# Altium PCB opto.PcbDoc (part 2 of 2)
Units mm, origin at the board's own origin, x right, y up, seen from the top; angles counter-clockwise.
Board outline 200 x 100 mm, 4 copper layers (Top Layer, Internal Plane 1, Internal Plane 2, Bottom Layer); 191 components, 0 nets, 885 pads, 39 vias.
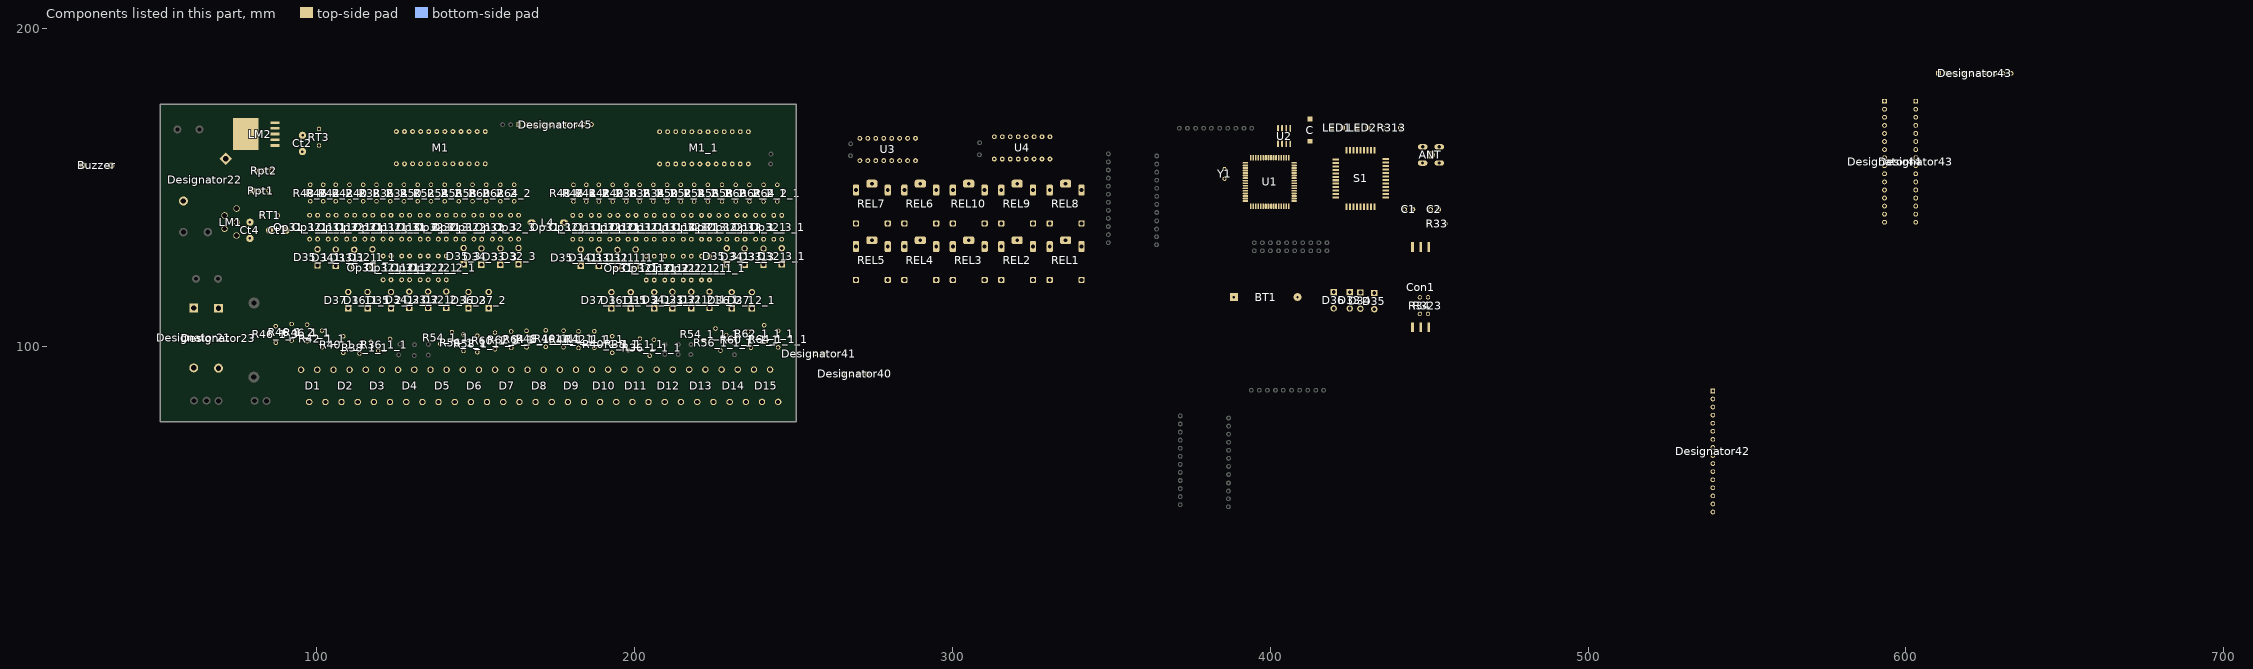
[diagram p4: the components of this part, seen from the top]

## Via types
v1: diameter 0.6, hole 0.4, Top Layer to Bottom Layer, 10 vias
v2: diameter 1.27, hole 0.711, Top Layer to Bottom Layer, 8 vias
v3: diameter 0.8, hole 0.5, Top Layer to Bottom Layer, 6 vias
v4: diameter 1, hole 0.7, Top Layer to Bottom Layer, 5 vias
v5: diameter 0.7, hole 0.4, Top Layer to Bottom Layer, 4 vias
v6: diameter 0.9, hole 0.6, Top Layer to Bottom Layer, 3 vias
v7: diameter 0.5, hole 0.4, Top Layer to Bottom Layer, 1 vias
v8: diameter 1, hole 0.6, Top Layer to Bottom Layer, 1 vias
v9: diameter 1, hole 0.65, Top Layer to Bottom Layer, 1 vias

## Nets (pads, with @x,y where several pads share a name; then routed paths per layer and width w, separated by ;. In a path a pad name is that pad's centre, name@x,y a point inside that pad or via, vN(x,y) a via of type N, cw(c..) or ccw(c..) an arc to the next point about the centre after c; other vN are vias at no path point) (continued)
copper on no net: | length 10328.6
  Top Layer w0.2: 269.635,131.367 269.635,131.477 ; 275.87,158.152 275.87,158.417 ; v2@281.82,154.967 v2(282.245,154.892) ; 329.595,131.367 330.595,131.367 ; 346.145,146.442 346.145,146.492 ; 348.365,157.997 349.05,157.997 ; 348.78,155.457 349.05,155.457 ; 370.971,75.549 371.656,75.549 ; 371.386,73.009 371.656,73.009 ; 392.109,151.24 392.177,151.308
  Top Layer w0.254: 64.742,135.916 65.707,135.916 ; 91.793,163.805 91.92,163.678 ; 103.527,139.269 103.567,139.309 ; 120.625,133.728 120.839,133.728 ; 120.799,139.269 120.839,139.309 ; 122.958,150.826 123.085,150.826 ; 123.085,133.427 123.085,133.728 ; 132.483,139.269 132.523,139.309 ; v3@136.674,132.338 v3(136.801,132.338) ; 138.198,139.269 138.238,139.309 ; 140.738,133.554 140.738,133.728 ; 143.659,139.269 143.699,139.309 ; 149.374,139.396 149.414,139.436 ; 155.216,139.269 155.256,139.309 ; 186.331,139.218 186.371,139.258 ; v6@189.913,169.012 v6(189.913,169.139) ; 203.429,133.677 203.643,133.677 ; 203.603,139.218 203.643,139.258 ; 205.762,150.775 205.889,150.775 ; 205.889,133.376 205.889,133.677 ; 215.287,139.218 215.327,139.258 ; v3@219.478,132.287 v3(219.605,132.287) ; 221.002,139.218 221.042,139.258 ; 223.542,133.503 223.542,133.677 ; 226.463,139.218 226.503,139.258 ; 232.178,139.345 232.218,139.385 ; 238.02,139.218 238.06,139.258
  Top Layer w0.4: 363.869,136.937 372.644,136.937 379.765,144.058 393.827,144.058 ; 364.194,134.477 373.359,134.477 380.794,141.912 393.869,141.912 394.627,142.67 394.627,144.058 ; 364.269,139.557 364.439,139.387 372.744,139.387 379.065,145.708 392.177,145.708 ; 364.269,142.097 372.529,142.097 376.94,146.508 392.177,146.508 ; 364.269,144.637 372.794,144.637 375.465,147.308 392.177,147.308 ; 364.269,147.177 372.734,147.177 373.665,148.108 392.177,148.108 ; 364.269,149.717 372.939,149.717 373.748,148.908 392.177,148.908 ; 364.269,152.257 372.724,152.257 375.273,149.708 392.177,149.708 ; 364.269,154.797 371.834,154.797 376.119,150.512 392.157,150.512 ; 394.964,132.577 394.964,133.082 402.627,140.745 402.627,144.058 ; v1(394.994,146.487) 395.427,146.054 395.427,144.058 ; 395.194,129.987 393.669,129.987 393.019,130.637 393.019,132.887 401.019,140.887 401.019,144.058 ; 396.227,144.058 v1(396.227,146.437) ; 397.027,144.058 397.027,146.07 v1(397.369,146.412) ; 397.504,130.037 397.504,129.072 396.544,128.112 393.644,128.112 392.119,129.637 392.119,133.362 400.227,141.47 400.227,144.058 ; 397.504,132.577 397.504,133.697 403.427,139.62 403.427,144.058 ; 397.827,144.058 397.827,143.02 389.194,134.387 389.194,128.362 392.594,124.962 404.019,124.962 405.124,126.067 405.124,130.037 ; 398.627,144.058 398.627,142.52 390.344,134.237 390.344,128.537 392.819,126.062 401.469,126.062 402.584,127.177 402.584,130.037 ; 399.427,144.058 399.427,141.995 391.219,133.787 391.219,129.062 393.269,127.012 398.744,127.012 400.044,128.312 400.044,130.037 ; 407.477,145.708 407.664,145.521 ; 429.434,161.741 430.529,161.741 ; 436.276,155.621 436.276,156.73
  Top Layer w0.5: 267.907,159.93 269.42,158.417 270.87,158.417 ; 267.945,163.692 269.67,165.417 270.87,165.417 ; 273.37,165.417 273.37,170.417 274.72,171.767 344.57,171.767 347.095,169.242 347.095,159.267 348.365,157.997 ; 275.82,165.417 275.82,169.067 277.67,170.917 343.17,170.917 345.645,168.442 345.645,158.592 348.78,155.457 ; 278.401,165.417 278.401,168.773 279.645,170.017 341.795,170.017 344.345,167.467 344.345,157.622 349.05,152.917 ; 280.82,165.417 280.82,167.967 281.895,169.042 340.67,169.042 343.02,166.692 343.02,156.407 349.05,150.377 ; 283.37,165.217 283.37,167.067 284.345,168.042 339.545,168.042 341.595,165.992 341.595,155.292 349.05,147.837 ; 285.87,165.417 285.87,163.617 286.845,162.642 336.72,162.642 337.67,161.692 337.67,156.677 349.05,145.297 ; v2@288.07,161.567 331.07,161.567 346.145,146.492 ; 308.52,164.017 310.42,165.917 313.17,165.917 ; 346.145,146.442 346.145,145.662 349.05,142.757 ; 364.269,157.337 371.194,157.337 377.221,151.31 392.214,151.31 ; 364.269,159.877 383.754,159.877 389.923,153.708 392.177,153.708 398.048,153.708 398.794,152.962 v1(398.794,149.737) ; 385.603,152.698 386.193,152.108 392.177,152.108 ; 385.603,155.798 388.493,152.908 392.177,152.908 ; 392.177,154.508 400.087,154.508 ; 400.044,132.577 400.044,134.412 404.227,138.595 404.227,144.058 ; v1(401.094,149.787) 401.973,148.908 407.477,148.908 414.815,148.908 415.619,149.712 415.619,156.287 414.998,156.908 408.71,156.908 ; 402.494,168.332 402.494,166.821 403.383,165.932 408.717,165.932 409.225,165.424 409.225,157.423 408.71,156.908 ; 402.584,132.577 402.584,134.502 405.027,136.945 405.027,144.058 ; 402.627,159.333 402.396,164.987 403.294,165.962 ; 403.427,159.358 403.427,163.195 403.764,163.532 ; v5@404.227,157.677 404.227,159.358 ; 405.027,159.358 v5(405.027,161.226) ; 405.092,132.609 405.827,133.345 405.827,144.058 ; 406.304,163.532 407.477,162.359 407.477,157.708 405.827,157.708 405.542,157.423 405.542,156.108 ; 407.477,146.508 409.148,146.508 410.204,145.452 410.204,132.577 ; 407.477,147.308 410.298,147.308 ; 407.477,156.108 405.542,156.108 ; 407.477,156.908 408.71,156.908 ; v1(413.969,148.108) 407.477,148.108 400.76,148.108 400.087,148.781 400.087,154.508 ; 415.619,151.142 420.528,151.142 423.957,151.142 ; 417.594,132.577 422.659,132.577 423.957,133.875 423.957,143.961 423.957,151.142 ; 419.294,168.687 419.669,168.687 ; 419.319,168.787 419.319,167.437 420.069,166.687 422.994,166.687 423.957,165.724 423.957,161.741 ; 425.053,161.741 425.053,166.495 427.369,168.812 ; 426.148,143.961 v1(426.148,145.834) ; 429.434,143.961 429.434,140.532 441.61,140.532 442.245,141.167 442.245,143.072 ; 429.434,151.158 429.434,161.741 ; 429.503,156.73 433.609,156.73 ; 430.529,143.961 430.529,146.342 431.069,146.882 432.72,146.882 ; 432.72,143.961 432.72,146.882 ; 436.276,152.296 433.043,152.296 431.889,151.142 ; 436.276,157.838 440.375,157.838 442.753,160.217 450.5,160.217 ; 436.276,158.947 434.244,158.947 433.609,158.312 433.609,156.73 ; 447.96,157.677 447.013,156.73 436.276,156.73 433.609,156.73 ; 400.087,154.508 400.087,155.524 400.671,156.108 405.542,156.108 ; 423.957,151.142 431.889,151.142 ; 431.889,151.142 432.72,150.311 432.72,146.882
  Top Layer w0.6: 97.939,150.826 103.781,156.668 109.043,156.668 113.511,161.136 113.511,171.191 116.742,174.422 140.281,174.422 145.361,169.342 145.361,167.564 ; 102.003,150.826 106.194,155.017 109.817,155.017 114.911,160.111 114.911,170.441 118.029,173.559 138.605,173.559 142.821,169.342 142.821,167.564 ; 105.94,150.826 108.607,153.493 110.593,153.493 116.386,159.286 116.386,169.866 119.24,172.721 136.776,172.721 140.281,169.215 140.281,167.564 ; 110.258,150.826 112.036,152.604 117.611,158.178 117.611,169.116 120.352,171.857 134.973,171.857 137.741,169.088 137.741,167.564 ; 114.576,150.826 118.886,155.135 118.886,168.441 121.387,170.943 133.601,170.943 135.201,169.342 135.201,167.564 ; 118.767,150.826 120.586,152.644 120.586,168.116 122.523,170.054 132.077,170.054 132.661,169.469 132.661,167.564 ; 123.085,150.826 121.986,151.925 121.986,167.354 123.72,169.088 129.512,169.088 130.121,168.479 130.121,167.564 ; 127.403,150.826 123.275,154.954 123.275,160.905 127.581,165.211 127.581,167.564 ; 127.591,157.379 127.591,154.956 131.721,150.826 ; 129.855,157.138 135.976,151.016 ; 132.407,157.15 138.732,150.826 140.23,150.826 ; 135.201,157.404 140.256,152.35 141.043,152.35 143.304,150.089 ; 137.741,157.404 142.872,152.274 147.546,152.274 148.866,150.953 ; 140.281,157.404 144.091,153.594 150.543,153.594 153.311,150.826 ; 142.821,157.404 145.488,154.737 153.845,154.737 157.756,150.826 ; 145.361,157.404 146.961,155.804 157.223,155.804 162.201,150.826 ; 178.769,169.742 178.769,168.88 180.3,167.35 188.251,167.35 v6@189.913,169.012 ; 180.743,150.775 187.067,157.099 191.059,157.099 196.436,162.476 196.436,168.991 201.842,174.397 223.06,174.397 228.165,169.292 228.165,167.514 ; 184.807,150.775 189.329,155.296 191.771,155.296 197.711,161.237 197.711,168.491 202.728,173.508 221.409,173.508 225.625,169.292 225.625,167.514 ; 188.744,150.775 191.208,153.238 192.075,153.238 198.986,160.149 198.986,168.116 203.514,172.644 219.605,172.644 223.085,169.165 223.085,167.514 ; 193.062,150.775 194.84,152.553 200.461,158.174 200.461,167.866 204.325,171.73 217.853,171.73 220.545,169.038 220.545,167.514 ; 197.38,150.775 201.911,155.306 201.911,167.541 205.236,170.866 216.43,170.866 218.005,169.292 218.005,167.514 ; 201.571,150.775 203.386,152.59 203.386,167.296 206.042,169.952 214.348,169.952 215.465,168.834 215.465,167.514 ; 205.889,150.775 204.975,151.689 204.975,167.488 206.524,169.038 212.316,169.038 212.925,168.428 212.925,167.514 ; 210.207,150.775 206.186,154.796 206.186,160.566 210.385,164.765 210.385,167.514 ; 210.395,157.329 210.395,154.905 214.525,150.775 ; 212.659,157.087 218.78,150.966 ; 215.694,157.481 215.694,156.261 221.18,150.775 223.034,150.775 ; 218.005,157.354 218.005,156.338 222.044,152.299 223.771,152.299 226.057,150.013 ; 220.545,157.354 220.799,157.354 225.854,152.299 230.273,152.299 231.67,150.902 ; 223.085,157.354 226.895,153.544 233.347,153.544 236.115,150.775 ; 225.625,157.354 228.419,154.56 236.776,154.56 240.56,150.775 ; 228.165,157.354 229.816,155.703 238.224,155.703 243.151,150.775 244.878,150.775 ; 410.298,147.308 412.744,144.862 412.744,132.577 ; 419.944,117.035 426.148,123.238 426.148,143.961 ; 420.338,159.01 v5(420.338,159.772) ; 424.994,116.985 424.994,119.344 427.243,121.593 427.243,143.961 ; 428.339,117.037 428.339,143.961 ; 429.434,140.532 429.434,121.847 432.212,119.069 432.212,116.91 ; 432.339,117.037 436.276,117.037 444.734,108.578 444.734,105.984 ; 436.276,152.296 443.434,152.296 444.785,150.946 444.785,143.072 444.785,131.286 ; 447.071,106.188 447.071,110.179 ; 449.611,106.188 449.611,110.179 ; 449.865,131.286 449.865,138.5
  Top Layer w0.7: 407.664,132.577 407.664,145.521
  Top Layer w0.8: 98.32,150.826 100.225,148.921 100.225,141.228 ; 102.003,150.826 103.908,148.921 103.908,143.387 106.067,141.228 ; 106.067,150.826 108.226,148.667 108.226,144.911 111.909,141.228 ; 117.624,141.228 119.348,142.952 122.958,142.952 125.244,145.238 125.244,148.159 127.213,150.127 127.213,150.508 ; 123.339,141.228 125.444,143.333 127.657,143.333 129.308,144.984 129.308,148.54 131.594,150.826 ; 129.489,141.228 133.626,145.365 133.626,148.667 135.976,151.016 ; 135.023,141.228 137.817,144.022 137.817,148.413 140.23,150.826 ; v3(136.801,132.338) 140.738,128.401 ; 140.738,141.228 142.008,142.498 142.008,148.54 144.358,150.889 ; 146.453,141.682 146.453,148.54 148.866,150.953 ; 151.914,141.228 151.914,149.81 152.93,150.826 ; 157.756,141.228 159.35,142.821 159.35,148.978 157.756,150.572 ; 162.201,150.826 163.199,150.826 164.125,149.9 164.125,141.754 163.598,141.228 ; 181.124,150.775 183.029,148.87 183.029,141.177 ; 184.807,150.775 186.712,148.87 186.712,143.336 188.871,141.177 ; 188.871,150.775 191.03,148.616 191.03,144.86 194.713,141.177 ; 200.428,141.177 201.117,141.177 202.841,142.901 205.762,142.901 208.048,145.187 208.048,148.108 210.017,150.077 210.017,150.458 ; 206.143,141.177 208.248,143.282 210.461,143.282 212.112,144.933 212.112,148.489 214.398,150.775 ; 212.293,141.177 212.674,141.177 216.43,144.933 216.43,148.616 218.78,150.966 ; 217.827,141.177 220.621,143.971 220.621,148.362 223.034,150.775 ; v3(219.605,132.287) 223.542,128.35 ; 223.542,141.177 224.812,142.447 224.812,148.489 227.086,150.762 ; 229.257,141.631 229.257,148.489 231.67,150.902 ; 234.718,141.177 234.718,149.759 235.734,150.775 ; 240.56,141.177 241.957,142.574 241.957,149.378 240.56,150.775 ; 244.878,150.775 246.65,149.003 246.65,141.552 246.275,141.177 ; 405.004,168.537 405.004,170.947 405.569,171.512 412.494,171.512 ; 406.444,168.537 411.644,168.537 412.494,167.687 412.494,164.527 ; 431.625,161.741 432.72,161.741
  Top Layer w1: 96.936,101.606 96.936,99.091 102.911,93.116 102.911,90.916 106.186,87.641 107.776,86.051 107.776,82.456 ; 103.567,139.309 103.567,141.228 ; v4(107.058,109.602) 107.058,108.052 111.528,103.582 124.279,103.582 126.108,101.753 126.108,100.432 ; 108.311,97.931 109.946,97.931 112.911,94.966 112.911,91.341 117.951,86.301 117.951,82.456 ; v4@109.115,108.205 112.087,105.233 125.295,105.233 128.165,102.363 128.165,95.117 130.666,92.616 ; 109.409,139.269 109.409,141.228 ; 109.877,111.964 107.464,114.377 107.464,118.314 111.147,121.996 112.544,121.996 113.814,123.267 113.814,132.411 113.433,132.792 113.433,135.078 113.814,135.459 118.894,135.459 120.625,133.728 ; 109.877,116.409 111.782,114.504 112.798,113.488 112.798,111.583 116.1,108.281 127.353,108.281 133.086,102.547 133.086,91.416 135.536,88.966 141.786,88.966 143.381,87.371 143.381,82.456 ; 109.877,117.067 115.338,122.528 115.338,131.268 116.354,132.284 121.942,132.284 123.085,133.427 ; 109.941,112.027 115.211,106.757 126.464,106.757 130.782,102.439 130.782,100.534 ; 115.124,139.269 115.124,141.228 ; 115.973,111.964 115.973,113.615 113.941,115.647 113.941,118.06 119.783,123.902 119.783,126.569 118.513,127.839 118.513,128.575 120.063,130.125 123.078,130.125 126.681,133.728 ; 115.973,117.044 118.259,114.758 129.943,114.758 132.102,112.599 132.102,108.713 137.132,103.683 137.132,97.871 140.861,94.141 140.861,92.391 ; 115.973,117.067 117.982,119.076 124.228,119.076 124.99,119.838 124.99,129.236 129.181,133.427 ; 116.1,111.964 118.259,109.805 128.216,109.805 135.1,102.921 135.1,100.534 ; 119.367,98.622 123.336,94.653 123.336,90.516 125.561,88.291 127.311,88.291 128.126,87.476 128.126,82.456 ; 120.839,139.309 120.839,141.228 ; 125.661,92.591 125.661,97.166 ; 126.681,139.396 126.681,141.228 ; 132.523,133.728 130.959,132.164 130.959,127.204 132.102,126.061 134.515,126.061 136.674,123.902 136.674,119.711 137.436,118.949 142.516,118.949 147.723,113.742 147.723,112.24 142.549,107.065 142.549,104.429 ; 132.523,139.309 132.523,141.228 ; 135.023,133.728 135.023,132.157 136.674,130.506 136.674,127.458 139.341,124.791 140.484,124.791 147.723,117.552 ; 138.238,133.728 143.405,128.561 143.405,124.664 145.056,123.013 149.755,123.013 151.787,120.981 151.787,116.282 154.073,113.996 154.073,111.964 ; 138.238,139.309 138.238,141.228 ; 140.738,133.554 145.691,128.601 152.676,128.601 154.2,127.077 154.2,116.977 156.861,114.316 156.861,110.716 154.818,108.673 151.857,105.712 150.457,105.712 148.586,103.841 148.586,95.046 151.016,92.616 ; 143.699,139.309 143.699,141.228 ; 146.182,103.692 154.086,111.596 ; 147.827,117.067 147.827,116.825 150.162,114.49 150.162,110.665 144.186,104.689 144.186,96.793 143.386,95.993 143.386,91.741 146.061,89.066 150.261,89.066 153.556,85.771 153.556,82.456 ; 147.901,167.564 147.901,165.405 152.981,160.325 152.981,157.404 159.585,157.404 166.85,150.14 v2(166.85,145.619) ; 149.414,139.436 149.414,141.228 ; 150.441,167.564 150.441,169.821 154.33,173.711 168.986,173.711 171.149,171.547 171.149,169.742 ; 150.511,98.131 153.611,95.031 153.611,88.474 154.819,87.266 157.261,87.266 158.651,85.876 158.651,82.456 ; 152.981,167.564 152.981,169.161 155.778,171.958 167.361,171.958 168.609,170.709 168.609,169.742 ; 155.256,139.309 155.256,141.228 ; 161.135,99.456 163.711,96.88 163.711,90.791 166.936,87.566 167.436,87.566 168.826,86.176 168.826,82.456 ; 166.069,169.742 166.069,168.144 169.24,164.973 v6@178.257,164.973 ; 172.031,99.856 172.031,96.021 174.286,93.766 174.286,90.516 179.001,85.801 179.001,82.456 ; 176.553,92.584 177.636,93.666 177.636,99.706 ; 182.344,99.531 182.344,95.909 184.011,94.241 184.011,88.122 185.217,86.916 187.761,86.916 189.126,85.551 189.126,82.481 ; 186.371,139.258 186.371,141.177 ; 186.578,92.584 187.322,93.327 187.322,99.531 ; 192.213,139.218 192.213,141.177 ; 192.681,111.913 190.268,114.326 190.268,118.263 191.157,119.152 192.554,119.152 196.618,123.216 196.618,132.36 196.35,132.628 196.35,135.14 196.618,135.408 201.698,135.408 203.429,133.677 ; 192.681,116.358 194.586,114.453 195.602,113.437 195.602,111.532 198.904,108.23 211.858,108.23 215.643,104.445 215.643,94.503 214.811,93.671 214.811,88.082 215.287,87.605 222.907,87.605 224.661,85.852 224.661,82.855 ; 192.681,117.016 198.142,122.477 198.142,131.217 199.158,132.233 204.746,132.233 205.889,133.376 ; 192.686,98.091 194.486,96.291 194.486,87.091 199.324,82.254 ; 192.745,111.977 198.015,106.706 210.842,106.706 213.738,103.81 213.738,100.483 ; v4(192.758,108.586) 192.758,106.122 194.988,103.891 208.069,103.891 209.547,102.413 209.547,100.432 ; v4@194.713,107.544 197.076,105.182 209.445,105.182 211.786,102.841 211.786,92.616 ; 197.088,92.593 197.861,93.366 197.861,98.516 198.042,98.697 ; 197.928,139.218 197.928,141.177 ; 198.777,111.913 198.777,113.564 196.745,115.596 196.745,118.009 202.587,123.851 202.587,126.518 201.317,127.788 201.317,128.524 202.867,130.074 205.882,130.074 209.485,133.677 ; 198.777,116.993 201.063,114.707 212.747,114.707 214.906,112.548 214.906,110.262 219.605,105.563 219.605,95.247 221.75,93.102 221.75,92.644 ; 198.777,117.016 200.786,119.025 207.032,119.025 207.794,119.787 207.794,129.185 211.985,133.376 ; 198.904,111.913 201.063,109.754 212.62,109.754 217.802,104.572 217.802,100.483 ; 203.643,139.258 203.643,141.177 ; 204.725,97.036 204.725,89.278 209.451,84.552 209.451,82.481 ; 206.991,92.644 209.361,95.014 209.361,97.066 ; 209.485,139.345 209.485,141.177 ; 215.327,133.677 213.763,132.113 213.763,127.153 214.906,126.01 217.319,126.01 219.478,123.851 219.478,119.66 220.24,118.898 225.32,118.898 230.527,113.691 230.527,110.783 225.299,105.554 ; 215.327,139.258 215.327,141.177 ; 217.827,133.677 217.827,131.6 219.478,129.949 219.478,127.407 222.145,124.74 222.837,124.74 230.076,117.501 230.527,117.501 ; 221.042,133.677 226.209,128.51 226.209,124.613 227.86,122.962 234.591,116.231 236.877,113.945 236.877,111.913 ; 221.042,139.258 221.042,141.177 ; 223.542,133.503 228.495,128.55 235.48,128.55 237.004,127.026 237.004,117.247 ; 226.503,139.258 226.503,141.177 ; 228.744,103.399 237.068,111.723 ; 230.631,117.016 233.448,114.199 233.448,111.024 224.533,102.109 224.533,91.06 227.454,88.139 233.169,88.139 234.729,86.578 234.729,82.484 ; 230.705,167.514 230.705,165.355 235.785,160.275 235.785,157.354 ; 231.249,97.704 235.099,93.854 235.099,90.348 237.335,88.113 238.706,88.113 240.078,86.742 240.078,82.246 ; 232.189,92.644 230.112,92.644 229.308,93.447 229.308,95.784 229.308,101.677 232.305,104.674 233.321,104.674 239.036,110.389 239.036,115.215 237.235,117.016 ; 232.218,139.385 232.218,141.177 ; v8(234.761,164.091) 239.786,164.091 242.886,160.466 ; 238.06,139.258 238.06,141.177 ; 269.635,108.117 269.635,120.867 ; 269.635,131.477 265.995,135.117 265.995,161.117 266.695,161.817 276.82,161.817 278.37,160.267 278.37,158.417 ; 269.635,149.147 269.635,152.607 273.37,156.342 273.37,158.417 ; 270.87,158.417 270.87,157.492 267.445,154.067 267.445,145.517 268.27,144.692 281.17,144.692 ; 270.87,165.417 270.87,171.042 272.77,172.942 347.245,172.942 ; 274.635,108.207 274.635,133.367 ; 275.87,158.152 284.875,149.147 ; 280.87,158.417 280.87,155.917 v2@281.82,154.967 ; v2(282.245,134.122) 284.875,131.367 ; 283.37,158.417 283.37,156.467 285.92,153.917 v7(294.82,153.917) ; 284.875,109.172 284.875,120.867 ; 285.87,158.417 285.87,156.342 286.545,155.667 v3(291.87,155.667) ; 288.37,158.417 289.695,157.092 v3(294.12,157.092) ; 289.875,108.872 289.875,133.367 ; 294.875,149.147 297,149.147 297.845,149.992 297.845,158.042 298.795,158.992 312.97,158.992 313.07,159.092 ; v2(297.345,134.137) 300.115,131.367 ; 300.115,109.422 300.115,120.867 ; 300.115,149.147 300.115,155.137 301.42,156.442 324.97,156.442 325.67,157.142 325.67,158.917 ; 305.115,109.237 305.115,133.367 ; 308.47,159.042 308.47,160.242 ; v2(312.745,133.967) 312.745,133.657 312.77,133.632 312.93,133.792 315.355,131.367 ; 315.355,108.352 315.355,120.867 ; 315.355,149.147 315.355,153.452 316.445,154.542 327.445,154.542 328.17,155.267 328.17,158.917 ; 320.355,108.857 320.355,133.367 ; v2(327.97,133.217) 327.97,132.992 329.595,131.367 ; 330.595,107.717 330.595,120.867 ; 330.595,149.147 330.595,158.842 ; 335.595,107.867 335.595,133.367 ; 347.27,172.942 349.05,171.162 349.05,160.537 ; 415.284,130.037 417.824,130.037 ; 415.284,132.577 417.824,132.577 ; 422.819,168.787 422.819,171.062 423.494,171.737 429.919,171.737 430.769,170.887 430.769,168.587 435.502,168.587 ; 444.785,143.072 450.373,143.072 ; 447.96,157.677 453.167,157.677 453.167,162.757 447.96,162.757 ; 452.913,143.072 455.072,140.913 455.072,138.5
  Top Layer w1.2: 70.974,141.183 76.13,141.183 79.855,144.908 79.855,149.149 ; 74.749,138.862 79.982,138.862 82.369,136.475 85.544,136.475 ; 78.059,143.053 87.729,143.053 87.729,141.148 ; 80.363,138.989 82.522,141.148 ; 86.84,170.395 84.794,170.395 84.046,169.647 84.046,167.488 84.739,166.795 86.84,166.795 97.058,166.795 100.683,163.17
  Top Layer w1.4: 97.725,141.228 99.684,139.269 159.153,139.269 161.058,141.174 ; 123.085,148.159 v3(125.371,150.445) ; 180.529,141.177 182.488,139.218 241.957,139.218 ; 205.889,148.108 v3(208.175,150.394) ; 242.886,160.466 244.561,160.466 248.386,156.641 ; 243.862,141.123 241.981,139.241 247.611,139.241 248.386,140.016
  Top Layer w1.5: 82.522,149.022 85.798,149.022 90.269,144.552 90.269,136.322 ; 110.258,145.619 123.085,145.619 123.085,148.159 ; 193.062,145.568 205.889,145.568 205.889,148.108 ; 248.386,140.016 248.386,156.641 ; 279.635,131.367 279.635,134.657 281.27,136.292 343.395,136.292 ; 279.635,149.147 279.635,146.227 281.17,144.692 338.37,144.692 340.595,146.917 340.595,149.147 343.57,146.172 343.57,134.342 340.595,131.367 ; 294.875,131.367 294.875,136.162 ; 294.875,145.197 294.875,149.147 ; 310.115,131.367 310.115,136.187 ; 310.115,145.022 310.115,149.147 ; 325.355,131.367 325.355,136.157 ; 325.355,144.707 325.355,149.147 ; 342.76,133.442 343.605,132.597 349.05,132.597
  Top Layer w1.6: 80.744,155.271 82.379,155.271 85.224,152.426 86.527,152.426 97.725,141.228 ; 82.421,155.271 84.732,157.582 89.38,157.582 91.92,160.122 91.92,163.678 ; 85.824,155.271 96.06,155.271 103.223,162.434 103.223,167.361 101.989,168.595 86.84,168.595 ; 86.84,164.995 90.603,164.995 91.793,163.805 ; 91.92,161.265 95.476,161.265
  Top Layer w1.8: 80.921,151.308 83.157,149.073
  Top Layer w1.9: 58.011,145.714 58.011,135.916 73.403,151.308 80.921,151.308 ; 65.707,135.916 69.933,135.916 ; 69.933,135.941 70.974,136.983
  Top Layer w2.2: 63.065,158.801 63.065,168.225 ; 74.368,134.443 74.529,134.604 ; 74.953,134.604 75.622,133.935 78.94,133.935 ; 81.887,158.751 56.995,158.751 53.972,155.728 53.972,81.867 56.873,78.966 82.536,78.966 84.193,80.623 84.193,82.772 ; 81.912,158.751 85.913,162.751
  Top Layer w3: 61.261,112.073 70.324,112.073 80.159,102.238 80.159,90.272 ; 61.369,82.88 61.369,93.291 ; 68.783,121.275 79.884,121.275 ; 69.076,82.808 69.076,93.591 ; 74.724,134.833 74.724,130.878 80.236,125.366 80.236,113.591
  Bottom Layer w0.2: 348.495,140.217 349.05,140.217 ; 371.101,57.769 371.656,57.769
  Bottom Layer w0.254: 97.46,141.228 97.725,141.228 ; 100.225,130.125 100.225,130.506 ; 105.94,130.125 105.94,130.402 ; 110.208,145.619 110.258,145.619 ; 110.258,150.826 110.512,150.826 ; 111.782,133.601 111.909,133.728 ; 114.576,150.699 114.576,150.826 114.83,150.826 ; 118.767,150.699 118.767,150.826 ; 123.085,150.699 123.085,150.826 ; 129.054,116.666 129.054,117.171 ; 160.971,140.88 160.971,141.228 ; 183.029,130.074 183.029,130.455 ; 188.744,130.074 188.744,130.351 ; 193.062,150.775 193.316,150.775 ; 194.586,133.55 194.713,133.677 ; 197.38,150.648 197.38,150.775 197.634,150.775 ; 201.571,150.648 201.571,150.775 ; 205.889,150.648 205.889,150.775 ; 207.845,157.277 207.845,157.354 ; 211.858,116.615 211.858,117.12 ; 230.705,157.354 230.705,157.912 ; 233.245,157.354 233.245,157.684 ; 233.245,167.514 233.245,167.844 ; 243.775,140.829 243.775,141.177 243.942,141.177 ; 244.878,145.568 244.878,145.72
  Bottom Layer w0.4: v1(394.994,146.487) 394.994,139.462 390.394,134.862 390.394,127.487 393.869,124.012 411.819,124.012 412.744,124.937 412.744,130.037
  Bottom Layer w0.5: 325.695,165.667 325.695,168.267 327.17,169.742 343.595,169.742 347.195,166.142 347.195,141.517 348.495,140.217 ; 328.17,165.917 328.17,167.042 329.42,168.292 342.745,168.292 345.52,165.517 345.52,141.207 349.05,137.677 ; 330.67,165.917 341.945,165.917 343.895,163.967 343.895,140.292 349.05,135.137 ; v1(396.227,146.437) 396.227,138.92 391.544,134.237 391.544,128.512 394.769,125.287 409.294,125.287 410.204,126.197 410.204,130.037 ; v1(397.369,146.412) 397.369,138.312 392.844,133.787 392.844,128.987 395.269,126.562 406.544,126.562 407.664,127.682 407.664,130.037 ; v1(398.794,149.737) v1@401.094,149.737
  Bottom Layer w0.6: 183.849,169.742 187.513,173.406 234.515,173.406 239.09,168.831 239.09,163.529 233.245,157.684 ; 186.389,170.155 188.32,172.086 233.702,172.086 237.693,168.095 237.693,164.9 230.705,157.912 ; v6(189.913,169.139) 191.538,170.765 232.534,170.765 235.785,167.514 ; 192.554,169.419 231.67,169.419 233.245,167.844 ; v5(404.145,157.677) v5(420.528,157.677) ; v5(405.027,161.226) 418.884,161.226 v5(420.338,159.772) ; 424.994,116.985 424.994,119.344 426.243,120.593 448.341,120.593 449.611,119.323 449.611,115.386 ; 428.339,116.91 428.339,114.592 429.323,113.608 445.293,113.608 447.071,115.386
  Bottom Layer w0.7: v2(288.42,161.542) 288.42,165.417
  Bottom Layer w0.78: 110.512,150.826 112.544,148.794 ; 193.316,150.775 195.348,148.743
  Bottom Layer w0.8: 95.476,161.265 112.71,161.265 119.036,167.591 ; 112.544,148.794 112.544,143.841 113.56,142.825 113.56,139.396 115.719,137.237 116.888,137.237 119.275,134.849 119.275,132.465 123.339,128.401 ; 114.83,150.826 116.481,149.175 116.481,145.111 119.148,142.444 119.148,139.015 120.799,137.364 122.45,137.364 124.99,134.824 124.99,132.592 129.181,128.401 ; 118.767,150.699 120.799,148.667 120.799,144.603 122.069,143.333 123.593,143.333 124.99,141.936 124.99,139.523 126.133,138.38 127.429,138.38 130.832,134.976 130.832,132.592 135.023,128.401 ; 123.085,150.699 124.99,148.794 124.99,144.984 126.387,143.587 129.308,143.587 130.832,142.063 130.832,139.015 131.594,138.253 133.372,138.253 136.674,134.951 v3@136.674,132.338 ; 138.238,128.514 142.135,132.411 v4(142.135,139.269) ; 195.348,148.743 195.348,143.79 196.364,142.774 196.364,139.345 198.523,137.186 199.87,137.186 202.079,134.976 202.079,132.414 206.143,128.35 ; 197.634,150.775 199.285,149.124 199.285,145.06 201.952,142.393 201.952,138.964 203.603,137.313 205.026,137.313 207.794,134.544 207.794,132.541 211.985,128.35 ; 201.571,150.648 203.603,148.616 203.603,144.552 204.873,143.282 206.397,143.282 207.794,141.885 207.794,139.472 208.937,138.329 210.182,138.329 213.636,134.875 213.636,132.541 217.827,128.35 ; 205.889,150.648 207.794,148.743 207.794,145.466 209.725,143.536 212.112,143.536 213.636,142.012 213.636,138.964 214.398,138.202 216.176,138.202 219.478,134.9 v3@219.478,132.287 ; 207.845,167.514 207.845,165.157 208.911,164.091 v8(234.761,164.091) ; 221.042,128.463 224.939,132.36 v6(224.939,139.218) ; 235.785,157.354 242.77,157.354 246.886,153.238 246.886,147.576 244.878,145.568
  Bottom Layer w1: 87.068,101.106 87.068,92.989 97.601,82.456 ; 87.094,106.241 87.094,115.574 96.923,125.403 100.225,125.403 100.225,126.95 97.725,129.45 97.725,133.728 ; 92.097,101.841 92.097,95.58 95.061,92.616 ; 92.097,106.916 92.097,113.178 95.558,116.638 99.511,120.591 102.086,120.591 105.94,124.446 105.94,125.299 105.94,127.204 103.567,129.577 103.567,133.728 ; 96.923,106.591 96.923,109.678 111.782,124.537 111.782,125.276 111.782,127.204 109.409,129.577 109.409,133.728 ; 100.141,92.616 94.51,98.247 94.51,109.932 108.607,124.029 108.607,127.458 105.94,130.125 ; 100.225,130.125 102.892,127.458 102.892,124.198 101.336,122.641 97.836,122.641 89.481,114.286 89.481,110.786 89.481,94.346 94.511,89.316 100.436,89.316 102.681,87.071 102.681,82.456 ; 100.225,130.506 100.225,133.728 ; 101.622,104.491 101.622,105.284 103.324,106.985 114.58,106.985 119.178,111.583 122.958,111.583 123.339,111.964 123.339,113.615 120.839,116.115 120.839,120.901 ; 106.067,130.529 106.067,133.728 ; v4@107.058,109.627 111.198,109.627 112.163,110.592 112.163,119.275 117.497,124.609 117.497,125.403 117.497,127.077 115.124,129.45 115.124,133.728 ; 108.311,103.138 109.44,104.268 115.837,104.268 120.261,108.691 127.306,108.691 129.054,110.44 129.054,112.068 129.054,113.742 126.681,116.115 126.681,120.901 ; v4@109.141,108.23 111.986,108.23 113.56,109.805 113.56,117.933 119.91,124.283 119.91,126.645 118.767,127.788 118.767,128.604 117.497,129.874 ; 110.261,92.416 105.586,97.091 105.586,103.541 107.633,105.588 115.183,105.588 119.586,109.991 125.304,109.991 126.26,110.948 126.26,113.742 123.339,116.663 ; 111.782,130.252 114.322,127.712 114.322,124.41 99.108,109.195 99.108,97.044 102.386,93.766 102.386,91.866 105.086,89.166 110.636,89.166 112.856,86.946 112.856,82.456 ; 111.782,130.379 111.782,133.601 ; 113.417,97.747 115.411,95.753 115.411,92.616 ; 117.099,101.499 117.599,101.499 122.095,105.995 133.855,105.995 135.023,107.163 135.023,112.068 135.023,113.869 132.523,116.369 132.523,120.901 ; 117.497,130.506 117.497,133.601 ; 119.036,167.591 124.835,167.591 125.011,167.768 ; 120.491,92.616 117.345,95.762 117.345,99.111 122.958,104.725 135.455,104.725 137.792,107.062 137.792,114.402 135.531,116.663 135.023,116.663 ; 120.839,128.401 122.671,126.569 136.406,126.569 138.238,128.401 ; 122.964,102.089 124.33,103.455 136.7,103.455 140.738,107.494 140.738,112.091 140.738,113.742 138.238,116.242 138.238,120.901 ; 123.031,82.456 123.031,87.396 121.261,89.166 114.011,89.166 112.986,90.191 112.986,94.591 111.061,96.516 111.061,100.516 113.466,102.921 116.541,102.921 120.986,107.366 130.578,107.366 131.899,108.687 131.899,113.821 129.054,116.666 ; 123.339,117.067 123.339,120.901 ; 125.041,157.404 125.041,159.28 129.413,163.652 161.341,163.652 163.529,165.841 163.529,169.742 ; 125.041,167.564 125.041,170.116 127.75,172.825 159.175,172.825 160.975,171.025 160.975,169.742 ; 126.681,126.569 126.681,128.401 ; 129.054,117.171 129.054,120.981 ; 130.461,96.941 130.911,96.941 133.236,94.616 133.236,90.541 134.561,89.216 137.061,89.216 138.301,87.976 138.301,82.456 ; 132.523,126.569 132.523,128.401 ; 133.206,82.456 133.206,86.546 131.436,88.316 126.108,88.316 123.339,91.085 123.339,95.098 123.339,100.305 125.219,102.185 137.73,102.185 143.024,107.48 143.024,114.504 140.738,116.79 ; 135.023,117.171 135.023,120.901 ; 135.1,97.016 135.1,93.553 136.161,92.491 ; 138.842,100.772 138.842,99.11 140.586,97.366 142.036,97.366 143.536,95.866 143.536,91.116 148.476,86.176 148.476,82.456 ; 140.738,117.194 140.738,120.901 ; 143.699,133.728 143.699,130.085 146.199,127.585 146.199,125.807 146.199,124.029 145.056,122.886 145.056,110.821 150.543,105.334 150.543,103.166 ; 146.136,92.616 146.136,98.531 ; 146.199,130.633 148.866,127.966 148.866,120.473 149.882,119.457 149.882,108.789 153.461,105.21 153.461,91.016 156.136,88.341 160.611,88.341 163.731,85.221 163.731,82.456 ; 146.199,130.91 146.199,133.728 ; 147.901,157.404 147.901,156.442 149.225,155.118 165.71,155.118 176.229,165.638 176.229,169.742 ; 147.901,167.564 147.901,169.026 148.617,169.742 158.435,169.742 ; 149.414,133.728 149.414,129.831 151.787,127.458 151.787,125.68 ; 150.619,157.481 150.619,159.56 151.638,160.579 167.224,160.579 173.689,167.045 173.689,169.742 ; 151.66,125.68 151.66,109.932 156.105,105.487 156.105,104.041 ; 151.787,130.506 154.454,127.839 154.454,122.598 158.391,118.661 158.391,98.611 161.191,95.811 161.191,92.616 ; 151.914,130.91 151.914,133.728 ; 155.256,133.728 155.256,129.958 157.756,127.458 157.756,125.68 157.756,123.096 161.135,119.718 161.135,104.663 ; 156.111,92.741 156.111,99.106 ; 157.756,130.379 160.961,127.174 160.961,123.466 163.319,121.108 163.319,94.565 163.861,94.023 163.861,90.666 167.354,87.173 173.029,87.173 173.906,86.296 173.906,82.456 ; 157.756,130.783 157.756,133.728 ; 160.971,133.728 160.971,129.958 163.471,127.458 163.471,125.807 165.961,123.318 165.961,118.619 165.961,104.863 ; 163.471,130.91 163.471,133.728 ; 163.702,130.91 169.415,125.197 169.415,117.653 169.415,94.567 171.366,92.616 ; 165.961,92.616 165.961,99.656 ; 172.082,104.891 172.082,113.562 183.029,124.51 183.029,125.352 183.029,126.899 180.529,129.399 180.529,133.677 ; 177.594,104.913 177.594,112.949 188.744,124.1 188.744,125.248 188.744,127.153 186.371,129.526 186.371,133.677 ; v6@178.257,165.1 200.023,165.1 207.845,157.277 ; 181.201,169.546 181.201,168.354 182.448,167.107 190.242,167.107 192.554,169.419 ; 181.541,92.616 180.236,93.921 180.236,112.941 191.411,124.117 191.411,127.407 188.744,130.074 ; 182.394,104.691 182.394,112.294 194.586,124.486 194.586,125.225 194.586,127.153 192.213,129.526 192.213,133.677 ; 183.029,130.074 185.696,127.407 185.696,124.302 174.495,113.1 174.495,98.582 178.636,94.441 178.636,90.091 184.081,84.646 184.081,82.456 ; 183.029,130.455 183.029,133.677 ; 187.26,104.715 188.819,106.274 196.542,106.274 201.8,111.532 205.762,111.532 206.143,111.913 206.143,113.564 203.643,116.064 203.643,120.85 ; 188.871,130.478 188.871,133.677 ; 191.666,92.641 190.395,93.912 190.395,104.395 190.7,104.699 197.101,104.699 202.156,109.754 207.921,109.754 209.064,110.897 209.064,113.691 206.143,116.612 ; v4@193.075,108.827 194.967,110.719 194.967,119.423 200.301,124.757 200.301,125.352 200.301,127.026 197.928,129.399 197.928,133.677 ; 193.086,103.277 197.914,103.277 203.121,108.484 209.953,108.484 211.858,110.389 211.858,112.017 211.858,113.691 209.485,116.064 209.485,120.85 ; 194.206,82.481 194.206,84.226 189.386,89.046 189.386,92.791 184.401,97.776 184.401,111.634 197.126,124.359 197.126,127.661 194.586,130.201 ; v4(194.586,107.671) 196.364,109.449 196.364,117.52 202.714,123.87 202.714,126.391 201.571,127.534 201.571,128.553 200.301,129.823 ; 194.586,130.328 194.586,133.55 ; 200.301,130.455 200.301,133.55 ; 201.77,102.333 205.381,105.944 216.049,105.944 217.827,107.722 217.827,112.017 217.827,113.818 215.327,116.318 215.327,120.85 ; 201.786,92.192 201.786,99.991 206.469,104.674 217.319,104.674 220.24,107.595 220.24,114.707 218.335,116.612 217.827,116.612 ; 203.643,128.35 205.475,126.518 219.21,126.518 221.042,128.35 ; 204.356,82.481 204.356,86.571 203.061,87.866 195.761,87.866 194.311,89.316 194.311,94.061 195.611,95.361 195.611,100.366 197.099,101.855 198.649,101.855 204.009,107.214 212.62,107.214 214.525,109.119 214.525,113.948 211.858,116.615 ; 205.993,101.984 207.413,103.404 218.335,103.404 223.542,108.611 223.542,112.04 223.542,113.691 221.042,116.191 221.042,120.85 ; 206.143,117.016 206.143,120.85 ; 209.485,126.518 209.485,128.35 ; 211.858,117.12 211.858,120.93 ; 213.649,97.354 214.811,96.191 214.811,89.301 219.701,84.411 219.701,82.481 ; 214.531,82.481 214.531,83.866 209.286,89.111 209.286,93.316 207.363,95.24 207.363,101.194 208.302,102.134 219.478,102.134 225.828,108.484 225.828,114.453 223.542,116.739 ; 215.327,126.518 215.327,128.35 ; 217.751,92.641 217.751,96.991 ; 217.827,117.12 217.827,120.85 ; 221.742,101.897 221.742,96.772 224.533,93.981 224.533,87.6 229.649,82.484 ; 223.542,117.143 223.542,120.85 ; 226.503,133.677 226.503,130.034 229.003,127.534 229.003,125.756 229.003,123.978 227.86,122.835 227.86,110.77 231.112,107.519 231.112,100.716 ; 227.144,92.382 227.144,98.636 ; 229.003,130.582 231.67,127.915 231.67,120.422 232.686,119.406 232.839,108.738 232.839,102.363 234.947,100.255 234.947,90.83 237.232,88.545 243.558,88.545 245.158,86.945 245.158,82.5 ; 229.003,130.859 229.003,133.677 ; 232.218,133.677 232.218,129.78 234.591,127.407 234.591,125.629 ; 234.464,125.629 234.464,109.881 235.709,108.636 235.709,104.643 ; 234.591,130.455 237.611,127.435 237.611,119.942 238.986,118.568 238.986,107.163 238.586,106.764 238.586,100.349 242.618,96.317 242.618,92.66 ; 234.718,130.859 234.718,133.677 ; 236.604,99.515 237.556,98.563 237.556,92.635 ; 238.06,133.677 238.06,129.907 240.56,127.407 240.56,125.629 ; 240.56,105.791 240.56,125.375 ; 240.56,130.328 242.669,128.22 242.669,101.169 ; 240.56,130.732 240.56,133.677 ; 243.775,133.677 243.775,129.907 246.275,127.407 246.275,125.756 246.275,121.057 245.209,119.99 245.209,104.75 ; 246.275,130.859 246.275,133.677 ; 246.506,130.859 248.333,129.033 248.333,120.193 247.393,119.254 247.393,100.661 ; 269.635,138.647 271.645,136.637 271.645,108.442 ; 274.635,151.147 277.545,148.237 277.545,108.442 ; v2(282.245,134.122) v2(282.245,154.892) ; 284.875,138.647 284.875,135.562 287.22,133.217 287.22,108.292 ; 289.875,151.147 289.875,141.787 292.595,139.067 292.595,108.417 ; v3(291.87,155.667) 311.47,155.667 312.93,154.207 312.745,154.022 v2(312.745,133.967) ; v3(294.12,157.092) 323.42,157.092 328.12,152.392 327.97,152.242 v2(327.97,133.217) ; v7(294.82,153.917) 294.97,153.917 297.345,151.542 v2(297.345,134.137) ; 300.115,138.647 300.115,136.022 302.27,133.867 302.27,109.142 ; 305.115,151.147 305.115,141.372 307.895,138.592 307.895,109.317 ; 313.145,165.917 v2(313.145,172.792) ; 315.355,138.647 315.355,135.557 317.62,133.292 317.62,108.417 ; 320.355,151.147 320.355,141.782 323.07,139.067 323.07,108.467 ; 330.595,138.647 330.595,135.567 332.87,133.292 332.87,107.692 ; 335.595,151.147 335.595,141.617 338.42,138.792 338.42,107.517 ; 388.561,115.487 369.719,115.487 367.719,117.487 367.719,168.512 371.594,172.387 402.619,172.387 403.719,171.287 403.719,168.062 ; v1(407.319,162.487) v1(432.694,162.487) ; 408.694,115.662 412.424,111.932 421.689,111.932 422.56,112.803 ; v1(413.969,148.108) 420.419,141.658 420.419,130.962 419.494,130.037 417.824,130.037 ; v1(426.148,145.834) 452.056,145.834 452.913,144.977 452.913,143.072 ; 432.339,111.934 423.472,111.934 422.56,112.846 422.56,122.625 424.211,124.276 443.134,124.276 444.785,125.927 444.785,143.072 ; 440.848,168.726 440.848,164.281 442.372,162.757 447.96,162.757
  Bottom Layer w1.4: 74.749,139.032 74.749,143.308 ; v3(125.371,150.445) 127.403,148.413 ; v3(208.175,150.394) 210.207,148.362
  Bottom Layer w1.5: 97.939,145.619 110.258,145.619 ; 101.622,99.731 101.622,98.33 105.236,94.716 105.236,92.616 ; 127.403,148.413 127.403,145.619 180.836,145.619 ; 160.971,140.88 162.935,138.916 167.576,138.916 ; 178.14,138.787 180.529,141.177 ; 180.743,145.568 193.062,145.568 ; 210.207,148.362 210.207,145.568 244.726,145.568
  Bottom Layer w1.7: 54.836,139.032 74.749,139.032
  Bottom Layer w2: 61.986,121.221 61.986,124.8 65.202,128.016 90.436,128.016 94.061,131.641 94.061,141.74 97.939,145.619 ; 82.572,166.795 v9@85.316,166.795
  Bottom Layer w2.8: 60.957,172.898 76.451,172.898 82.572,166.777
  Bottom Layer w3: 55.347,121.221 61.986,121.221 ; 60.957,172.898 54.404,166.345 54.404,92.177 58.74,87.841 75.426,87.841 80.423,82.844 ; 65.306,82.88 65.306,87.091
  other v1: 403.769,168.437
  other v4: 109.141,108.255
  other v6: 178.257,164.998
  other v9: 85.316,166.726

## Polygon pours and split planes (outlines as drawn)
no net on Internal Plane 1 (split plane): 250.29,76.71 51.31,76.71 51.31,175.69 250.29,175.69
no net on Internal Plane 2 (split plane): 250.29,76.71 51.31,76.71 51.31,175.69 250.29,175.69

## Keep-outs
Keep-Out Layer:
  lines w0.3: 52.3,77.221 52.3,167.594 59.814,175.108 241.526,175.108 249.7,166.934 249.7,77.221 52.3,77.221 ; 264.995,98.617 264.995,160.217 264.995,171.042 268.145,174.192 272.195,174.192 349.32,174.192 350.97,172.542 350.97,129.317 349.82,128.167 348.27,126.617 348.27,98.617 264.995,98.617 ; 287.601,16.169 370.876,16.169 370.876,44.169 372.426,45.719 373.576,46.869 373.576,90.094 371.926,91.744 294.801,91.744 290.751,91.744 287.601,88.594 287.601,77.769 287.601,16.169 ; 362.519,104.712 365.144,102.087 455.169,102.087 457.569,104.487 457.569,171.27 455.327,173.512 455.011,173.512 363.719,173.512 362.519,172.312 362.519,104.712 ; 385.125,22.263 385.125,89.863 386.325,91.063 477.617,91.063 477.933,91.063 480.175,88.821 480.175,22.038 477.775,19.638 387.75,19.638 385.125,22.263 ; 499.013,93.426 499.013,190.826 696.413,190.826 696.413,93.426 499.013,93.426 ; 509.204,115.203 592.479,115.203 592.479,133.171 595.179,135.871 595.179,189.128 593.529,190.778 516.404,190.778 512.354,190.778 509.204,187.628 509.204,176.803 509.204,115.203 ; 601.33,121.958 603.955,119.333 693.98,119.333 696.38,121.733 696.38,188.516 694.138,190.758 693.822,190.758 602.53,190.758 601.33,189.558 601.33,121.958

## Other copper
Top Layer:
  text "-" at 76.892,82.107 h1.52
  text "+" at 86.849,81.828 h1.52

## Silkscreen, mask and mechanical layers (free items; w line width, h text height)
Top Overlay:
  lines w0.254: 67.084,81.229 59.845,81.229 ; 82.201,81.193 78.619,81.193 ; 59.845,81.229 59.845,84.531 70.854,84.531 70.854,81.229 59.845,81.229 ; 78.619,81.193 85.971,81.193 85.971,84.495 78.619,84.495 78.619,81.193
Mechanical 5:
  lines w0.254: 349.05,160.537 352.739,160.537 ; 358.41,157.337 364.269,157.337 ; 359.013,159.877 364.269,159.877 ; 359.147,131.937 364.194,131.937 ; 371.394,168.622 371.394,171.928 ; 379.014,168.622 379.014,171.988 ; 394,86.173 416.76,86.173 ; 394.154,168.622 394.154,171.859 ; 593.242,151.723 603.005,151.723 ; 593.259,149.183 603.005,149.183 ; 593.259,177.123 603.08,177.123 ; 593.268,174.583 603.08,174.583 ; 597.789,93.37 597.789,199.619
Drill Drawing:
  text ".LEGEND" at 255.88,81.28 h1.52
  text "Drill Drawing." at 255.88,78.74 h1.52

## Text inside footprints (layer, text, board x,y; h text height)
BT1: Top Overlay "CR2032" at 397.544,108.987 h1.52
Buzzer: Top Overlay "+" at 26.861,157.896 h1.52
M1: Top Overlay "4067" at 136.391,159.604 h1.52 r90
M1_1: Top Overlay "4067" at 219.195,159.554 h1.52 r90
Op31_1_1_1_1: Top Overlay "NEC" at 99.725,135.528 h1.52 r90
Op31_1_1_1_1_1: Top Overlay "NEC" at 182.529,135.477 h1.52 r90
Op31_1_1_2_1: Top Overlay "NEC" at 122.839,122.701 h1.52 r90
Op31_1_1_2_1_1: Top Overlay "NEC" at 205.643,122.65 h1.52 r90
Op31_1_1_3: Top Overlay "NEC" at 122.839,135.528 h1.52 r90
Op31_1_1_3_1: Top Overlay "NEC" at 205.643,135.477 h1.52 r90
Op31_1_2: Top Overlay "NEC" at 145.699,135.528 h1.52 r90
Op31_1_2_1: Top Overlay "NEC" at 228.503,135.477 h1.52 r90
Op31_2_1_1: Top Overlay "NEC" at 111.409,135.528 h1.52 r90
Op31_2_1_1_1: Top Overlay "NEC" at 194.213,135.477 h1.52 r90
Op31_2_2_1: Top Overlay "NEC" at 134.523,122.701 h1.52 r90
Op31_2_2_1_1: Top Overlay "NEC" at 217.327,122.65 h1.52 r90
Op31_2_3: Top Overlay "NEC" at 134.523,135.528 h1.52 r90
Op31_2_3_1: Top Overlay "NEC" at 217.327,135.477 h1.52 r90
Op31_3: Top Overlay "NEC" at 157.256,135.528 h1.52 r90
Op31_3_1: Top Overlay "NEC" at 240.06,135.477 h1.52 r90
Op32_1_1_1_1: Top Overlay "NEC" at 105.567,135.528 h1.52 r90
Op32_1_1_1_1_1: Top Overlay "NEC" at 188.371,135.477 h1.52 r90
Op32_1_1_2_1: Top Overlay "NEC" at 128.681,122.701 h1.52 r90
Op32_1_1_2_1_1: Top Overlay "NEC" at 211.485,122.65 h1.52 r90
Op32_1_1_3: Top Overlay "NEC" at 128.681,135.528 h1.52 r90
Op32_1_1_3_1: Top Overlay "NEC" at 211.485,135.477 h1.52 r90
Op32_1_2: Top Overlay "NEC" at 151.414,135.528 h1.52 r90
Op32_1_2_1: Top Overlay "NEC" at 234.218,135.477 h1.52 r90
Op32_2_1_1: Top Overlay "NEC" at 117.124,135.528 h1.52 r90
Op32_2_1_1_1: Top Overlay "NEC" at 199.928,135.477 h1.52 r90
Op32_2_2_1: Top Overlay "NEC" at 140.238,122.701 h1.52 r90
Op32_2_2_1_1: Top Overlay "NEC" at 223.042,122.65 h1.52 r90
Op32_2_3: Top Overlay "NEC" at 140.238,135.528 h1.52 r90
Op32_2_3_1: Top Overlay "NEC" at 223.042,135.477 h1.52 r90
Op32_3: Top Overlay "NEC" at 162.971,135.528 h1.52 r90
Op32_3_1: Top Overlay "NEC" at 245.775,135.477 h1.52 r90
REL1: Top Overlay "NC" at 336.789,120.437 h1; Top Overlay "NO" at 332.699,120.437 h1
REL2: Top Overlay "NC" at 321.549,120.437 h1; Top Overlay "NO" at 317.459,120.437 h1
REL3: Top Overlay "NC" at 306.309,120.437 h1; Top Overlay "NO" at 302.219,120.437 h1
REL4: Top Overlay "NC" at 291.069,120.437 h1; Top Overlay "NO" at 286.979,120.437 h1
REL5: Top Overlay "NC" at 275.829,120.437 h1; Top Overlay "NO" at 271.739,120.437 h1
REL6: Top Overlay "NC" at 291.069,138.217 h1; Top Overlay "NO" at 286.979,138.217 h1
REL7: Top Overlay "NC" at 275.829,138.217 h1; Top Overlay "NO" at 271.739,138.217 h1
REL8: Top Overlay "NC" at 336.789,138.217 h1; Top Overlay "NO" at 332.699,138.217 h1
REL9: Top Overlay "NC" at 321.549,138.217 h1; Top Overlay "NO" at 317.459,138.217 h1
REL10: Top Overlay "NC" at 306.309,138.217 h1; Top Overlay "NO" at 302.219,138.217 h1